# EAGLE board Motherboard_simple (EAGLE 6.4)
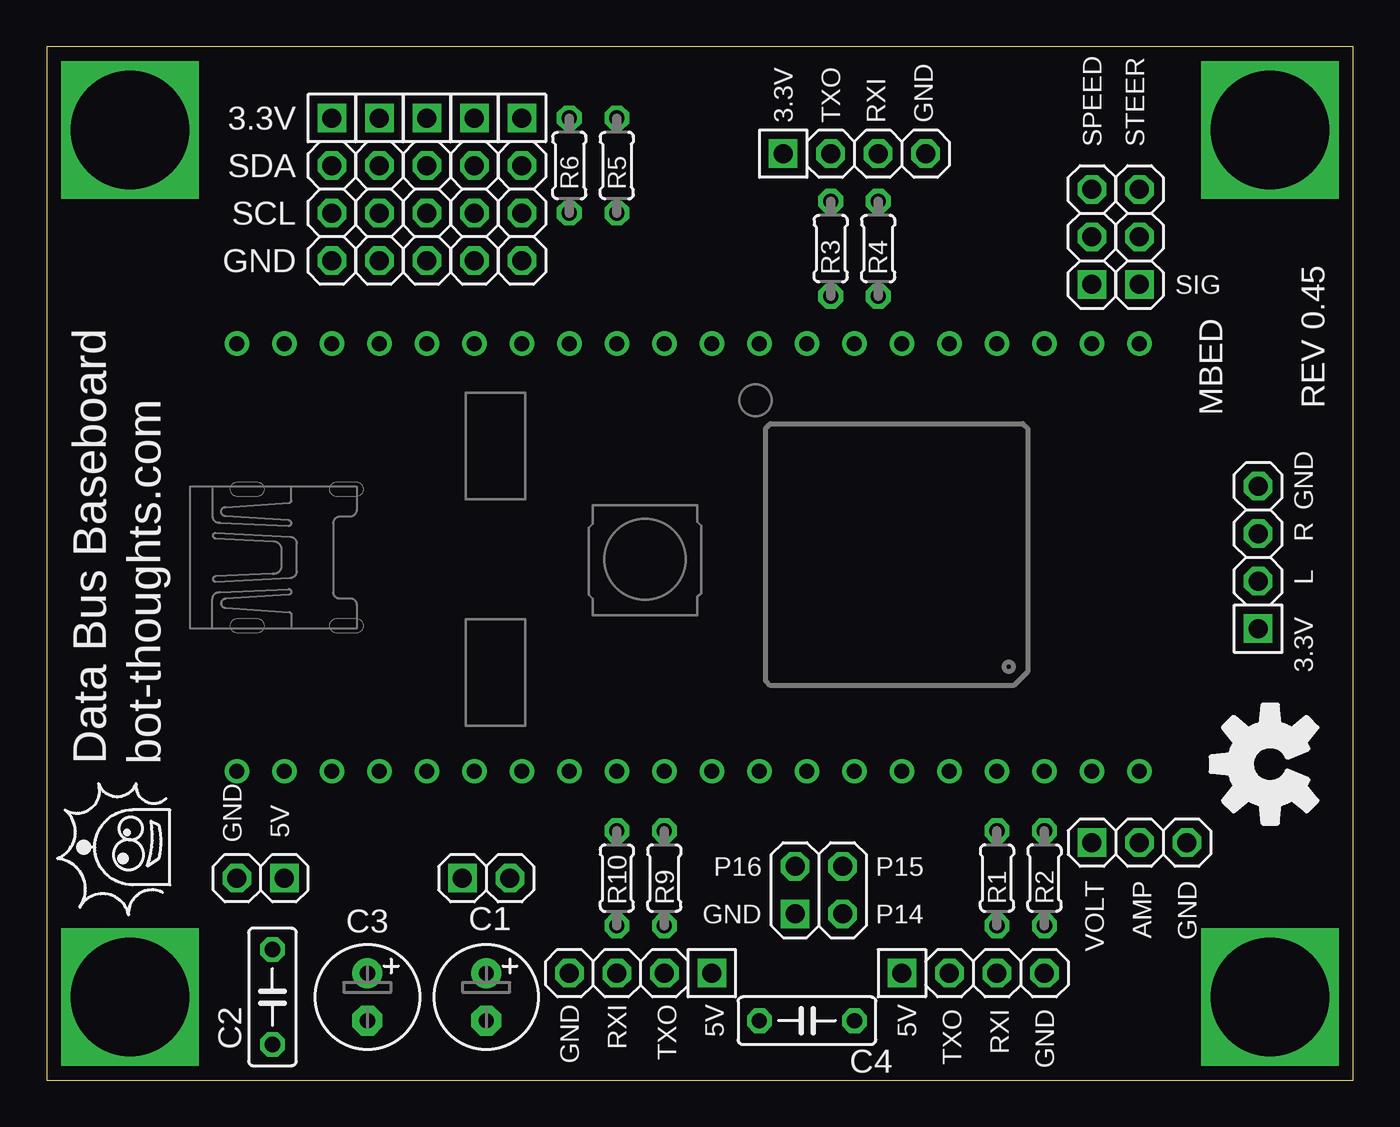
[diagram p0: board, top side]
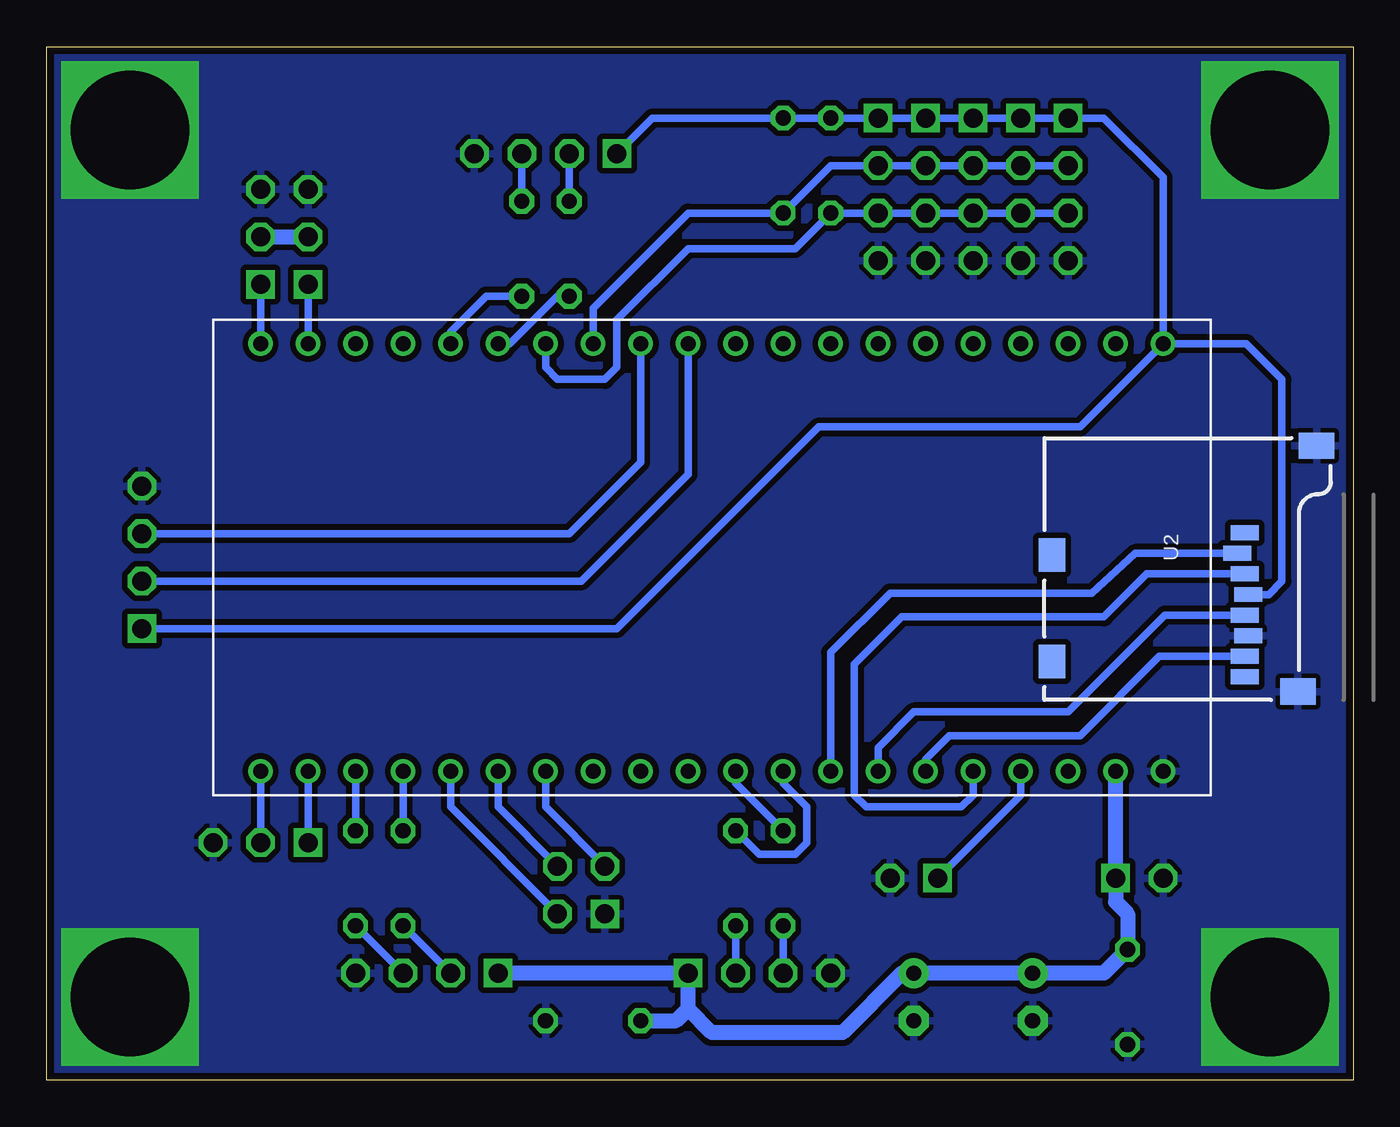
[diagram p1: board, bottom side, seen from below]

Size 69.85 x 55.24 mm. Coordinates in mm from the lower left corner, seen from the top.
Outline: 0,0 69.85,0 69.85,55.24 0,55.24 0,0
Copper layers (1*16): Top 0.0356mm / dielectric 1.5011mm / Bottom 0.0356mm
Design rules "LaenPCBOrder *": minimum track width 6mil, minimum drill 13mil, track to track 6mil, track to pad 6mil, pad to pad 6mil, via to via 6mil, smd to smd 6mil, copper to edge 15mil, drill to drill 6mil, minimum pad ring 10mil, minimum via ring 7mil, stop-mask expansion 4mil, vias tented up to drill 20mil, thermal gap 10mil

## Footprints (pad centres in the part's own frame; a part is rotated, then mirrored left to right if it is on the bottom)
E2,5-6 = drill 0.813 pad 1.6: + -1.27,0 | drill 0.813 pad 1.6 octagon: - 1.27,0
C050-025X075 = drill 0.813 octagon: 1 -2.54,0; 2 2.54,0
2X02 = drill 1.016 square: 1 -1.27,-1.27 | drill 1.016 octagon: 2 -1.27,1.27; 3 1.27,-1.27; 4 1.27,1.27
1X04-S = drill 1.016 square: 1 -3.81,0 | drill 1.016 octagon: 2 -1.27,0; 3 1.27,0; 4 3.81,0
1X02-S = drill 1.016 square: 1 -1.27,0 | drill 1.016 octagon: 2 1.27,0
1X03-S = drill 1.016 square: 1 -2.54,0 | drill 1.016 octagon: 2 0,0; 3 2.54,0
MBED-KIT = drill 0.8: D+ 11.43,1.27; D- 11.43,3.81; GND -11.43,24.13; IF+ 11.43,16.51; IF- 11.43,19.05; NR -11.43,16.51; P$5 -11.43,13.97; P$6 -11.43,11.43; P$7 -11.43,8.89; P$8 -11.43,6.35; P$9 -11.43,3.81; P$10 -11.43,1.27; P$11 -11.43,-1.27; P$12 -11.43,-3.81; P$13 -11.43,-6.35; P$14 -11.43,-8.89; P$15 -11.43,-11.43; P$16 -11.43,-13.97; P$17 -11.43,-16.51; P$18 -11.43,-19.05; P$19 -11.43,-21.59; P$20 -11.43,-24.13; P$21 11.43,-24.13; P$22 11.43,-21.59; P$23 11.43,-19.05; P$24 11.43,-16.51; P$25 11.43,-13.97; P$26 11.43,-11.43; P$27 11.43,-8.89; P$28 11.43,-6.35; P$29 11.43,-3.81; P$30 11.43,-1.27; RD+ 11.43,11.43; RD- 11.43,13.97; TD+ 11.43,6.35; TD- 11.43,8.89; VB -11.43,19.05; VIN -11.43,21.59; VOUT 11.43,24.13; VU 11.43,21.59
0204/5 = drill 0.813 octagon: 1 -2.54,0; 2 2.54,0
MICRO-SD-SOCKET-PP = smd 0.8 x 1.5: 1 -8.94,10.7; 2 -7.84,10.3; 3 -6.74,10.7; 4 -5.64,10.9; 5 -4.54,10.7; 6 -3.44,10.9; 7 -2.34,10.7; 8 -1.24,10.7 | smd 1.8 x 1.4: CD1 -2.05,0.4; CD2 -7.75,0.4 | smd 1.4 x 1.9: GND1 -13.6,14.55; GND3 -0.45,13.55

## Placement (x,y rotation side)
C1  470uF  [E2,5-6]  23.5,4.45 270 top
C2  0.01uF  [C050-025X075]  12.06,4.45 270 top
C3  10uF  [E2,5-6]  17.14,4.45 270 top
C4  0.01uF  [C050-025X075]  40.64,3.17 0 top
JP1  BUTTONS  [2X02]  41.27,10.16 0 top
JP2  UART1  [1X04-S]  43.18,49.53 0 top
JP3  POWER  [1X02-S]  11.43,10.79 180 top
JP4  RST  [1X02-S]  23.5,10.79 0 top
JP5  I2C  [1X04-S]  25.4,47.62 270 top
JP6  UART3  [1X04-S]  49.53,5.71 0 top
JP8  SPEED  [1X03-S]  55.88,45.09 90 top
JP9  STEER  [1X03-S]  58.42,45.09 90 top
JP10  UART2  [1X04-S]  31.75,5.71 180 top
JP11  I2C  [1X04-S]  20.32,47.62 270 top
JP12  I2C  [1X04-S]  15.24,47.62 270 top
JP13  I2C  [1X04-S]  22.86,47.62 270 top
JP14  I2C  [1X04-S]  17.78,47.62 270 top
JP15  ENCODERS  [1X04-S]  64.77,27.94 90 top
JP17  VA  [1X03-S]  58.42,12.7 0 top
MBED  MBED_NXP_LPC1768  [MBED-KIT]  34.29,27.94 90 top
R1  220  [0204/5]  50.8,10.79 270 top
R2  220  [0204/5]  53.34,10.79 270 top
R3  220  [0204/5]  41.91,44.45 90 top
R4  220  [0204/5]  44.45,44.45 90 top
R5  2.2K  [0204/5]  30.48,48.9 90 top
R6  2.2K  [0204/5]  27.94,48.9 90 top
R9  220  [0204/5]  33.02,10.79 270 top
R10  220  [0204/5]  30.48,10.79 270 top
U2  USD-SOCKETNEW  [MICRO-SD-SOCKET-PP]  16.51,20.32 270 bottom

## Library data of the parts
C1-C4 = rcl
JP1 = pinhead-2
JP2 JP4 JP6 JP8 JP9 JP11-JP15 JP17 = pinhead-2; OC_NEWARK: unknown
JP3 JP5 JP10 = pinhead-2; DATABASE: ./../../../eagle/PARTSDB.TXT; OC_NEWARK: unknown
MBED = MBED_v2.1; MPN: 2212S-20SG-85; OC_NEWARK: 08N6778
R1-R4 = rcl; MPN: WCR0805-220RFI; OC_NEWARK: 98K2621
R5 R6 = rcl; OC_NEWARK: unknown
R9 R10 = rcl; DATABASE: ./../../../eagle/PARTSDB.TXT; MPN: WCR0805-220RFI; OC_NEWARK: 98K2621
U2 = SparkFun

## Nets
!CS1: MBED.P$8 U2.2
!RESET: JP4.1 MBED.NR
+3V3: JP2.1 JP5.1 JP11.1 JP12.1 JP13.1 JP14.1 JP15.1 MBED.VOUT R5.2 R6.2 U2.4
+5V: C1.+ C2.1 C3.+ C4.1 JP3.1 JP6.1 JP10.1 MBED.VIN
AMP: JP17.2 MBED.P$20
ENC_LEFT: JP15.2 MBED.P$30
ENC_RIGHT: JP15.3 MBED.P$29
GND: C1.- C2.2 C3.- C4.2 JP1.1 JP2.4 JP3.2 JP4.2 JP5.4 JP6.4 JP8.3 JP9.3 JP10.4 JP11.4 JP12.4 JP13.4 JP14.4 JP15.4 JP17.3 MBED.GND U2.6 U2.GND1 U2.GND3
MISO1: MBED.P$6 U2.7
MOSI1: MBED.P$5 U2.3
N$1: JP6.2 R1.2
N$2: JP6.3 R2.2
N$3: JP8.2 JP9.2
N$5: JP1.2 MBED.P$14
N$6: JP17.1 MBED.P$19
N$7: JP1.4 MBED.P$15
N$8: JP1.3 MBED.P$16
N$9: JP2.2 R3.2
N$10: JP2.3 R4.2
N$16: JP10.2 R9.2
N$17: JP10.3 R10.2
RXD1: MBED.P$25 R4.1
RXD2: MBED.P$10 R10.1
RXD3: MBED.P$18 R2.1
SCK1: MBED.P$7 U2.5
SCL: JP5.3 JP11.3 JP12.3 JP13.3 JP14.3 MBED.P$27 R6.1
SDA: JP5.2 JP11.2 JP12.2 JP13.2 JP14.2 MBED.P$28 R5.1
SPEED: JP8.1 MBED.P$22
STEER: JP9.1 MBED.P$21
TXD1: MBED.P$26 R3.1
TXD2: MBED.P$9 R9.1
TXD3: MBED.P$17 R1.1
VB: MBED.VB
VU: MBED.VU

## Tracks (layer width: path | path; a pad name or v marks a point on that pad's centre or on a via)
!CS1
  Bottom 0.406: U2.2 11.65,28.16 13.97,26.04 24.77,26.04 27.94,22.86 MBED.P$8
!RESET
  Bottom 0.406: JP4.1 17.78,15.24 MBED.NR
+3V3
  Bottom 0.406: MBED.VOUT 10.16,48.26 13.34,51.44 JP12.1 JP14.1 JP11.1 JP13.1 JP5.1 R6.2 R5.2 37.47,51.44 JP2.1 | JP15.1 39.37,24.13 28.57,34.92 14.61,34.92 MBED.VOUT | U2.4 4.52,25.96 3.81,26.67 3.81,37.47 5.71,39.37 MBED.VOUT
+5V
  Bottom 0.813: MBED.VIN JP3.1 12.7,9.53 12.06,8.89 C2.1 13.34,5.71 C3.+ C1.+ 24.13,5.71 27.3,2.54 34.29,2.54 35.56,3.81 | 35.56,3.81 JP10.1 JP6.1 | C4.1 36.2,3.17 35.56,3.81
AMP
  Bottom 0.406: JP17.2 MBED.P$20
ENC_LEFT
  Bottom 0.406: JP15.2 41.27,26.67 35.56,32.38 MBED.P$30
ENC_RIGHT
  Bottom 0.406: JP15.3 41.91,29.21 38.1,33.02 MBED.P$29
GND  (via drill 6.35)
  other vias: 4.45,50.8 65.41,50.8 65.41,4.45 4.45,4.45
  pour Bottom (isolate 0.305, rank 3): 0,55.24 69.85,55.24 69.85,0 0,0
MISO1
  Bottom 0.406: MBED.P$6 22.86,17.14 21.59,18.41 14.61,18.41 10.36,22.66 U2.7
MOSI1
  Bottom 0.406: U2.3 11.04,27.06 13.34,24.77 24.13,24.77 26.67,22.23 26.67,15.24 26.04,14.61 20.95,14.61 20.32,15.24 MBED.P$5
N$1
  Bottom 0.406: JP6.2 R1.2
N$2
  Bottom 0.406: JP6.3 R2.2
N$3
  Bottom 0.813: JP9.2 JP8.2
N$5
  Bottom 0.406: JP1.2 43.18,14.61 MBED.P$14
N$6
  Bottom 0.406: JP17.1 MBED.P$19
N$7
  Bottom 0.406: JP1.4 45.72,14.61 MBED.P$15
N$8
  Bottom 0.406: JP1.3 48.26,14.61 MBED.P$16
N$9
  Bottom 0.406: JP2.2 R3.2
N$10
  Bottom 0.406: JP2.3 R4.2
N$16
  Bottom 0.406: R9.2 JP10.2
N$17
  Bottom 0.406: JP10.3 R10.2
RXD1
  Bottom 0.406: R4.1 46.35,41.91 48.26,40.01 MBED.P$25
RXD2
  Bottom 0.406: R10.1 33.02,15.88 MBED.P$10
RXD3
  Bottom 0.406: R2.1 MBED.P$18
SCK1
  Bottom 0.406: U2.5 10.06,24.86 15.24,19.68 23.5,19.68 25.4,17.78 MBED.P$7
SCL
  Bottom 0.406: JP12.3 JP14.3 JP11.3 JP13.3 JP5.3 R6.1 29.84,44.45 35.56,44.45 39.37,40.64 39.37,38.1 40.01,37.47 42.55,37.47 43.18,38.1 MBED.P$27
SDA
  Bottom 0.406: JP12.2 JP14.2 JP11.2 JP13.2 JP5.2 27.94,48.9 R5.1 35.56,46.35 40.64,41.27 MBED.P$28
SPEED
  Bottom 0.406: JP8.1 MBED.P$22
STEER
  Bottom 0.406: JP9.1 MBED.P$21
TXD1
  Bottom 0.406: R3.1 42.55,41.91 45.09,39.37 MBED.P$26
TXD2
  Bottom 0.406: R9.1 31.75,12.06 29.84,12.06 29.21,12.7 29.21,14.61 30.48,15.88 MBED.P$9
TXD3
  Bottom 0.406: R1.1 MBED.P$17

## Text on the board
tNames: 3.3V | 3.3V | TXO | RXI | GND | SDA | SPEED | STEER | SCL | GND | SIG | REV 0.45 | GND | R | L | 3.3V | Data Bus Baseboard | bot-thoughts.com | GND | 5V | P16 | P15 | VOLT | AMP | GND | GND | P14 | GND | RXI | TXO | 5V | 5V | TXO | RXI | GND
tDocu: Yes, this is backwards; fix when mounting